# Altium PCB SC-70-5p.pcbdoc
Units mm, origin at the board's own origin, x right, y up, seen from the top; angles counter-clockwise.
Board outline 27.96 x 29.01 mm, 2 copper layers (Top Layer, Bottom Layer); 1 components, 0 nets, 5 pads, 0 vias.
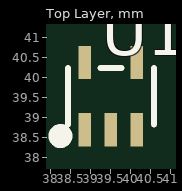
[diagram p0: Top Layer view]
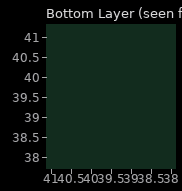
[diagram p1: Bottom Layer view, seen from below]

## Layer stack, top to bottom
Top Layer: signal copper (thickness not stored)
Dielectric: dielectric 0.32, FR-4, Dk 4.8
Bottom Layer: signal copper (thickness not stored)

## Board outline
53.362,25.4 25.4,25.4 25.4,54.408 53.362,54.408

## Components (designator, comment, footprint, x,y, rotation, side; value= is the part's Value field where it differs from the comment)
U1 "SC-70-5_L2.1-W1.3-P0.65-LS2.1-BL" SC-70-5_L2.1-W1.3-P0.65-LS2.1-BL 39.51,39.541 r0 top

## Footprints (in the part's own frame and the unit in brackets; to place one, negate y for a bottom-side part, rotate by r counter-clockwise, add the part's x,y. Pads: shape width x height; smd on the part's side, far side on the other; paste and mask are expansions set on the pad)
SC-70-5_L2.1-W1.3-P0.65-LS2.1-BL [mm]
  rect 0.315x0.835 smd: 1(-0.65,-0.843) 2(0,-0.843) 3(0.65,-0.843) 4(0.65,0.842) 5(-0.65,0.843)
  silkscreen extent -1.41,-1.14 1.08,0.7

## Nets (pads, with @x,y where several pads share a name; then routed paths per layer and width w, separated by ;. In a path a pad name is that pad's centre, name@x,y a point inside that pad or via, vN(x,y) a via of type N, cw(c..) or ccw(c..) an arc to the next point about the centre after c; other vN are vias at no path point)
pads on no net: U1.1 U1.2 U1.3 U1.4 U1.5